# Altium PCB Copy of MB1363.PcbDoc (part 6 of 6)
Units mm, origin at the board's own origin, x right, y up, seen from the top; angles counter-clockwise.
Board outline 60.78 x 109.88 mm, 4 copper layers (Top Layer, Signal Layer 1, Signal Layer 2, Bottom Layer), stack 0.453 mm thick; 231 components, 215 nets, 716 pads, 2915 vias.
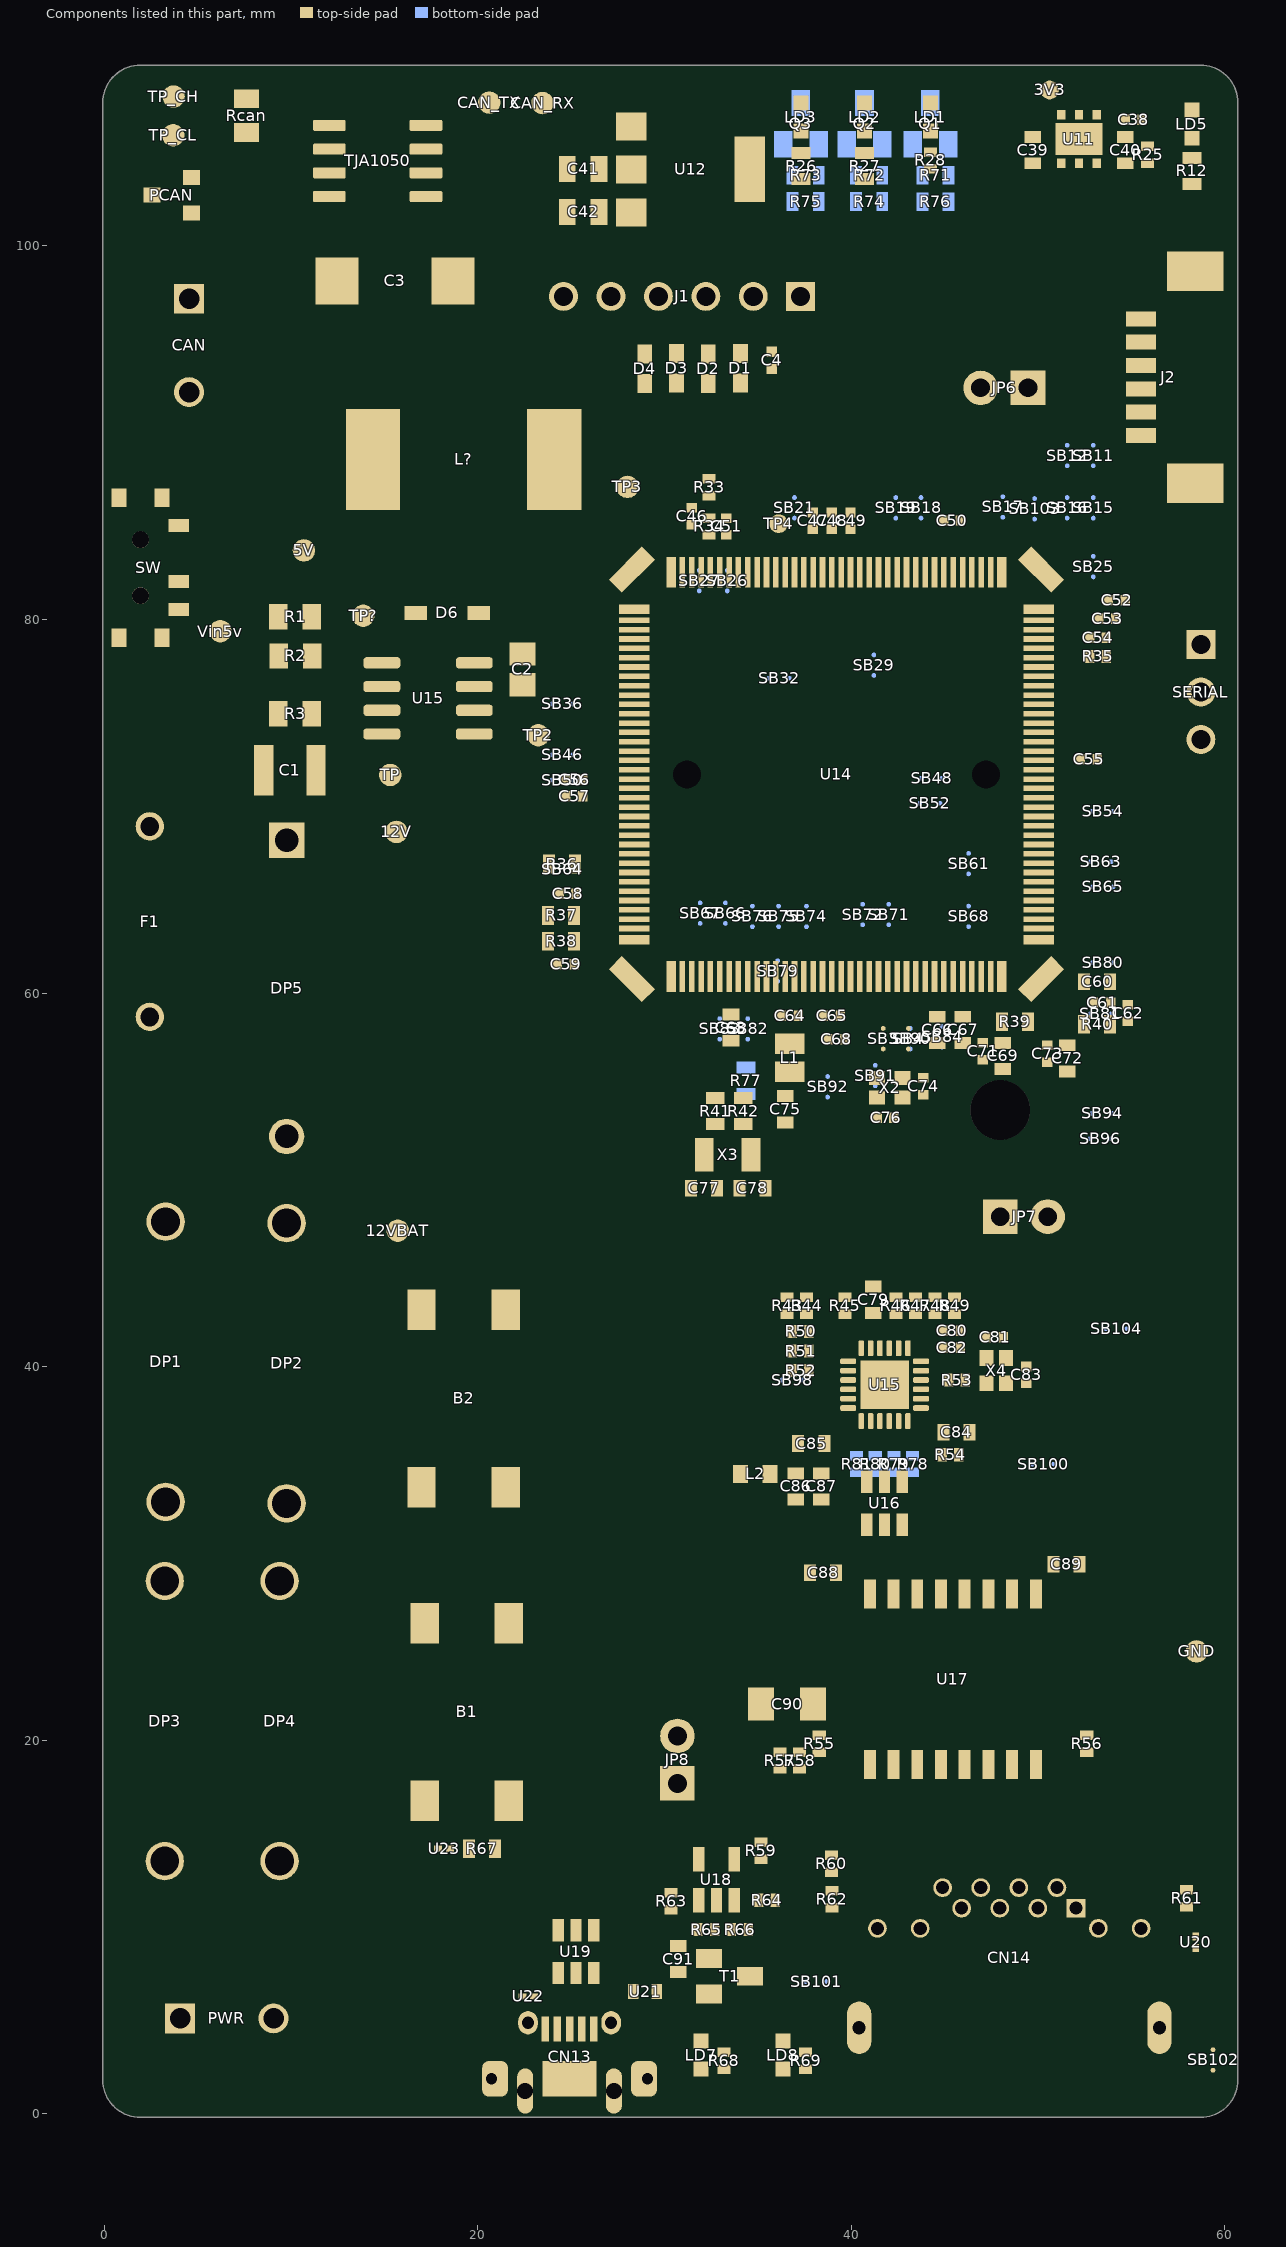
[diagram p7: the components of this part, seen from the top]

## Silkscreen, mask and mechanical layers (free items; w line width, h text height) (continued)
Drill Drawing:
  drawing of 490 lines, arcs and shapes, not listed
  text "PCB SPECIFICATIONS :" at 70.761,229.669 h3
  text "PCB : TYPE 3" at 219.173,229.437 h3
  text "A.   MATERIAL :" at 70.761,225.669 h3
  text "FR-4" at 109.261,225.669 h3
  text "TG-170" at 125.761,225.669 h3
  text "X  TG-150" at 144.011,225.669 h3
  text "TG-140" at 160.011,225.669 h3
  text "ASPECT-RATIO, AXE Z :" at 219.173,223.937 h3
  text "B.   MATERIAL FAMILY :" at 70.761,222.669 h3
  text "N/A" at 109.261,222.669 h3
  text "C.   SOLDERMASK COLOR :" at 70.761,219.669 h3
  text "GREEN" at 109.261,219.669 h3
  text "X  WHITE" at 125.761,219.669 h3
  text "RED" at 144.011,219.669 h3
  text "BLACK" at 160.011,219.669 h3
  text "6:1 to 8:1 / LEVEL \"B\"" at 219.191,217.189 h3
  text "D.   SILKSCREEN COLOR :" at 70.761,216.669 h3
  text "WHITE" at 109.261,216.669 h3
  text "YELLOW" at 125.761,216.669 h3
  text "BLACK" at 144.011,216.669 h3
  text "X  Blue ink PANTONE 2955" at 160.011,216.669 h3
  text "E.   SURFACE FINISH :" at 70.761,213.669 h3
  text "X  ENIG" at 109.261,213.669 h3
  text "IMMERSION SILVER" at 125.761,213.669 h3
  text "IMMERSION TIN" at 160.011,213.669 h3
  text "Symbol" at 352.253,213.235 h2.4
  text "Count" at 361.656,213.235 h2.4
  text "Hole Size" at 372.42,213.235 h2.4
  text "Plated" at 391.67,213.235 h2.4
  text "Hole Type" at 399.925,213.235 h2.4
  text "Drill Layer Pair" at 411.939,213.235 h2.4
  text "Hole Length" at 434.694,213.235 h2.4
  text "Routed Path Length" at 452.972,213.235 h2.4
  text "MINIMUM PARAMETERS" at 219.218,211.588 h3
  text "HASL" at 109.261,210.669 h3
  text "HASL (PB-FREE)" at 125.761,210.669 h3
  text "GOLDEN FINGER" at 160.011,210.669 h3
  text "2902" at 361.656,209.09 h2
  text "0.200mm (7.87mil)" at 372.42,209.09 h2
  text "PTH" at 391.67,209.09 h2
  text "Round" at 399.925,209.09 h2
  text "Top Layer - Bottom Layer" at 411.939,209.09 h2
  text "-" at 434.694,209.09 h2
  text "-" at 452.972,209.09 h2
  text "F.   IMPEDANCE CONTROL :" at 70.761,207.669 h3
  text "NO" at 109.261,207.669 h3
  text "X  YES  (SEE IMPEDANCE TABLE FOR DETAIL INFORMATION)" at 125.761,207.669 h3
  text "DEFAULT" at 219.218,206.088 h3
  text "13" at 361.656,204.944 h2
  text "0.300mm (11.81mil)" at 372.42,204.944 h2
  text "PTH" at 391.67,204.944 h2
  text "Round" at 399.925,204.944 h2
  text "Top Layer - Bottom Layer" at 411.939,204.944 h2
  text "-" at 434.694,204.944 h2
  text "-" at 452.972,204.944 h2
  text "G.   THROUGH VIA :" at 70.761,204.669 h3
  text "PLUG THE VIAS WHICH ARE COVERED WITH SOLDERMASK ONE OR TWO SIDE." at 109.261,204.669 h3
  text "PLUG MATERIAL :" at 109.261,201.669 h3
  text "X  SOLDERMASK" at 134.761,201.669 h3
  text "NON-CONDUCTIVE EPOXY." at 160.011,201.669 h3
  text "2" at 361.656,200.799 h2
  text "0.600mm (23.62mil)" at 372.42,200.799 h2
  text "PTH" at 391.67,200.799 h2
  text "Slot" at 399.925,200.799 h2
  text "Top Layer - Bottom Layer" at 411.939,200.799 h2
  text "1.300mm (51.18mil)" at 434.694,200.799 h2
  text "0.700mm (27.56mil)" at 452.972,200.799 h2
  text "TRACKS : 0.120mm           / GAPS : 0.120mm" at 219.218,200.338 h3
  text "H.   STACK-UP :" at 70.761,198.669 h3
  text "SEE LAYER STACK-UP SEQUENCE FOR OVERALL THICKNESS." at 109.261,198.669 h3
  text "2" at 361.656,196.654 h2
  text "0.650mm (25.59mil)" at 372.42,196.654 h2
  text "PTH" at 391.67,196.654 h2
  text "Slot" at 399.925,196.654 h2
  text "Top Layer - Bottom Layer" at 411.939,196.654 h2
  text "0.850mm (33.47mil)" at 434.694,196.654 h2
  text "0.200mm (7.88mil)" at 452.972,196.654 h2
  text "Layer" at 261.259,194.625 h2
  text "Name" at 269.629,194.625 h2
  text "Material" at 285.811,194.625 h2
  text "Thickness" at 300.355,194.625 h2
  text "Constant" at 312.3,194.625 h2
  text "Board Layer Stack" at 323.356,194.625 h2
  text "12" at 361.656,192.509 h2
  text "0.700mm (27.56mil)" at 372.42,192.509 h2
  text "PTH" at 391.67,192.509 h2
  text "Round" at 399.925,192.509 h2
  text "Top Layer - Bottom Layer" at 411.939,192.509 h2
  text "-" at 434.694,192.509 h2
  text "-" at 452.972,192.509 h2
  text "Top Overlay" at 269.629,190.625 h2
  text "2" at 361.656,188.363 h2
  text "0.700mm (27.56mil)" at 372.42,188.363 h2
  text "PTH" at 391.67,188.363 h2
  text "Slot" at 399.925,188.363 h2
  text "Top Layer - Bottom Layer" at 411.939,188.363 h2
  text "2.200mm (86.61mil)" at 434.694,188.363 h2
  text "1.500mm (59.06mil)" at 452.972,188.363 h2
  text "Top Solder" at 269.629,186.625 h2
  text "Solder Resist" at 285.811,186.625 h2
  text "0,015mm" at 300.355,186.625 h2
  text "3.5" at 312.3,186.625 h2
  text "2" at 361.656,184.218 h2
  text "0.850mm (33.47mil)" at 372.42,184.218 h2
  text "NPTH" at 391.67,184.218 h2
  text "Slot" at 399.925,184.218 h2
  text "Top Layer - Bottom Layer" at 411.939,184.218 h2
  text "2.425mm (95.47mil)" at 434.694,184.218 h2
  text "1.575mm (62.01mil)" at 452.972,184.218 h2
  text "1" at 261.259,182.625 h2
  text "Top Layer" at 269.629,182.625 h2
  text "0,042mm" at 300.355,182.625 h2
  text "2" at 361.656,180.073 h2
  text "0.900mm (35.43mil)" at 372.42,180.073 h2
  text "NPTH" at 391.67,180.073 h2
  text "Round" at 399.925,180.073 h2
  text "Top Layer - Bottom Layer" at 411.939,180.073 h2
  text "-" at 434.694,180.073 h2
  text "-" at 452.972,180.073 h2
  text "Dielectric 1" at 269.629,178.625 h2
  text "FR-4" at 285.811,178.625 h2
  text "0,099mm" at 300.355,178.625 h2
  text "4.2" at 312.3,178.625 h2
  text "6" at 361.656,175.927 h2
  text "1.000mm (39.37mil)" at 372.42,175.927 h2
  text "PTH" at 391.67,175.927 h2
  text "Round" at 399.925,175.927 h2
  text "Top Layer - Bottom Layer" at 411.939,175.927 h2
  text "-" at 434.694,175.927 h2
  text "-" at 452.972,175.927 h2
  text "2" at 261.257,174.625 h2
  text "Signal Layer 1" at 269.629,174.625 h2
  text "0,035mm" at 300.355,174.625 h2
  text "2" at 361.656,171.782 h2
  text "1.010mm (39.76mil)" at 372.42,171.782 h2
  text "PTH" at 391.67,171.782 h2
  text "Round" at 399.925,171.782 h2
  text "Top Layer - Bottom Layer" at 411.939,171.782 h2
  text "-" at 434.694,171.782 h2
  text "-" at 452.972,171.782 h2
  text "Dielectric 2" at 269.629,170.625 h2
  text "0,102mm" at 300.355,170.625 h2
  text "4.2" at 312.3,170.625 h2
  text "9" at 361.656,167.637 h2
  text "1.020mm (40.16mil)" at 372.42,167.637 h2
  text "PTH" at 391.67,167.637 h2
  text "Round" at 399.925,167.637 h2
  text "Top Layer - Bottom Layer" at 411.939,167.637 h2
  text "-" at 434.694,167.637 h2
  text "-" at 452.972,167.637 h2
  text "3" at 261.259,166.625 h2
  text "Signal Layer 2" at 269.629,166.625 h2
  text "0,035mm" at 300.355,166.625 h2
  text "4" at 361.656,163.492 h2
  text "1.100mm (43.31mil)" at 372.42,163.492 h2
  text "PTH" at 391.67,163.492 h2
  text "Round" at 399.925,163.492 h2
  text "Top Layer - Bottom Layer" at 411.939,163.492 h2
  text "-" at 434.694,163.492 h2
  text "-" at 452.972,163.492 h2
  text "A" at 351.465,163.238 h1.84
  text "Dielectric 3" at 269.629,162.625 h2
  text "0,099mm" at 300.355,162.625 h2
  text "4.2" at 312.3,162.625 h2
  text "2" at 361.656,159.346 h2
  text "1.260mm (49.61mil)" at 372.42,159.346 h2
  text "PTH" at 391.67,159.346 h2
  text "Round" at 399.925,159.346 h2
  text "Top Layer - Bottom Layer" at 411.939,159.346 h2
  text "-" at 434.694,159.346 h2
  text "-" at 452.972,159.346 h2
  text "4" at 261.259,158.625 h2
  text "Bottom Layer" at 269.629,158.625 h2
  text "0,042mm" at 300.355,158.625 h2
  text "2" at 361.656,155.201 h2
  text "1.500mm (59.06mil)" at 372.42,155.201 h2
  text "NPTH" at 391.67,155.201 h2
  text "Round" at 399.925,155.201 h2
  text "Top Layer - Bottom Layer" at 411.939,155.201 h2
  text "-" at 434.694,155.201 h2
  text "-" at 452.972,155.201 h2
  text "Bottom Solder" at 269.629,154.625 h2
  text "Solder Resist" at 285.811,154.625 h2
  text "0,015mm" at 300.355,154.625 h2
  text "3.5" at 312.3,154.625 h2
  text "8" at 361.656,151.056 h2
  text "1.550mm (61.02mil)" at 372.42,151.056 h2
  text "PTH" at 391.67,151.056 h2
  text "Round" at 399.925,151.056 h2
  text "Top Layer - Bottom Layer" at 411.939,151.056 h2
  text "-" at 434.694,151.056 h2
  text "-" at 452.972,151.056 h2
  text "Bottom Overlay" at 269.629,150.625 h2
  text "1" at 361.656,146.91 h2
  text "3.200mm (125.98mil)" at 372.42,146.91 h2
  text "NPTH" at 391.67,146.91 h2
  text "Round" at 399.925,146.91 h2
  text "Top Layer - Bottom Layer" at 411.939,146.91 h2
  text "-" at 434.694,146.91 h2
  text "-" at 452.972,146.91 h2
  text "2971 Total" at 361.656,142.765 h2
  text "Slot definitions :" at 352.253,139.863 h2
  text "Routed Path Length" at 365.894,139.863 h2
  text "= Calculated from tool start centre position to tool end centre position." at 382.79,139.863 h2
  text "Hole Length" at 365.894,138.205 h2
  text "= Routed Path Length + Tool Size = Slot length as defined in the PCB layout" at 376.518,138.205 h2

## Dimensions
14.966,105.8 to 63.226,104.53 on M4-Bottom Dimensions
47.986,53.73 to 63.226,104.53 on M4-Bottom Dimensions
7.346,127.39 to 7.346,13.09 on M4-Bottom Dimensions
14.966,33.41 to 7.346,13.09 on M4-Bottom Dimensions
7.346,13.09 to 6.1,0.391 on M4-Bottom Dimensions
16.236,29.6 to 7.346,13.09 on M4-Bottom Dimensions
16.236,29.6 to 61.956,29.6 on M4-Bottom Dimensions
14.966,33.41 to 63.226,33.41 on M4-Bottom Dimensions
7.346,13.09 to 70.846,13.065 on M4-Bottom Dimensions
4.1,2.391 to 74.1,2.391 on M4-Bottom Dimensions
47.986,53.73 to 63.226,104.53 on M4-Bottom Dimensions
63.226,104.53 to 70.846,101.965 on M4-Bottom Dimensions
7.346,127.39 to 7.346,101.99 on M4-Bottom Dimensions
7.346,129.93 to 6.1,133.731 on M4-Bottom Dimensions
63.226,104.53 to 70.846,127.39 on M4-Bottom Dimensions
72.1,133.731 to 72.1,0.391 on M4-Bottom Dimensions
14.966,105.8 to 7.346,101.99 on M4-Bottom Dimensions
-0.064,1.8 to -0.064,1.8 on M3-Top Dimensions
-0.064,107.675 to -0.064,1.8 on M3-Top Dimensions

## Text inside footprints (layer, text, board x,y; h text height)
C3: Top Overlay "+" at 14.051,97.363 h1.52
CN13: Top Overlay "1" at 28.825,3.625 h1.5; M14-Top Assembly "1" at 26.098,4.039 h1; M14-Top Assembly "5" at 23.398,4.039 h1; M7-Top Info "EDGE" at 29.348,-0.136 h0.75; M7-Top Info "PCB" at 18.698,-0.136 h0.75
CN14: Top Overlay "1" at 51.814,11.975 h1.5; Top Overlay "G" at 42.139,10.65 h1.5; Top Overlay "Y" at 53.939,10.675 h1.5; M14-Top Assembly "YELLOW" at 52.869,8.75 h0.8; M14-Top Assembly "GREEN" at 41.269,8.75 h0.8; M14-Top Assembly "1" at 51.869,10.55 h1.5; M14-Top Assembly "2" at 50.694,11.4 h1.5; M14-Top Assembly "8" at 44.569,11.4 h1.5; M14-Top Assembly "7" at 45.619,10.525 h1.5; M7-Top Info "BOARD OUTLINE /  / CUT OUT" at 42.969,2.5 h1.52; M7-Top Info "PCB" at 38.869,-0.8 h1.5; M7-Top Info "EDGE" at 55.469,-0.8 h1.5; Keep-Out Layer "BOARD OUTLINE /  / CUT OUT" at 42.969,2.5 h1.52
JP6: Top Overlay "1" at 50.944,91.876 h1.5; M14-Top Assembly "1" at 49.725,92.925 h1.5 r180
JP7: Top Overlay "1" at 46.181,47.574 h1.5; M14-Top Assembly "1" at 47.731,47.499 h1.5
JP8: Top Overlay "1" at 31.15,15.875 h1.5 r90; M14-Top Assembly "1" at 31.225,17.425 h1.5 r90
LD1: M14-Top Assembly "K" at 44.491,107.797 h0.75 r90
LD2: M14-Top Assembly "K" at 40.966,107.797 h0.75 r90
LD3: M14-Top Assembly "K" at 37.558,107.797 h0.75 r90
LD5: M14-Top Assembly "K" at 58.498,107.418 h0.75 r90
LD7: M14-Top Assembly "K" at 32.216,4.029 h0.75 r90
LD8: M14-Top Assembly "K" at 36.591,4.029 h0.75 r90
U11: Top Overlay "1" at 53.852,106.424 h1.5
U12: Top Overlay "1" at 28.1,107.625 h1.5 r270; M14-Top Assembly "4" at 33.775,104.425 h1.5 r270; M14-Top Assembly "1" at 28.05,106.6 h1.5 r270; M14-Top Assembly "2" at 28.025,104.45 h1.5 r270; M14-Top Assembly "3" at 28,102.15 h1.5 r270
U14: Top Overlay "1" at 30.991,59.479 h1.5 r90; M14-Top Assembly "72" at 49.241,79.554 h1 r90; M14-Top Assembly "37" at 49.216,61.979 h1 r90; M14-Top Assembly "108" at 30.966,79.679 h1 r90; M14-Top Assembly "144" at 30.166,62.229 h1 r90; M14-Top Assembly "36" at 48.466,61.704 h1 r90; M14-Top Assembly "109" at 30.166,79.129 h1 r90; M14-Top Assembly "73" at 48.466,79.754 h1 r90; M14-Top Assembly "1" at 30.791,61.854 h1 r90
U15: Top Overlay "1" at 43.925,36.55 h1.5; M14-Top Assembly "6" at 44.241,40.154 h0.65 r90; M14-Top Assembly "7" at 43.191,41.479 h0.65 r180; M14-Top Assembly "25" at 42.091,39.254 h0.65 r180; M14-Top Assembly "1" at 44.266,37.704 h0.65 r90; M14-Top Assembly "24" at 43.366,36.979 h0.65 r180; M14-Top Assembly "12" at 40.816,41.479 h0.65 r180; M14-Top Assembly "13" at 39.341,40.554 h0.65 r270; M14-Top Assembly "19" at 40.816,36.979 h0.65 r180; M14-Top Assembly "18" at 39.341,38.054 h0.65 r270
U16: Top Overlay "1" at 43.25,33.8 h1.5; M14-Top Assembly "2" at 41.941,34.104 h0.75 r180; M14-Top Assembly "1" at 42.841,34.104 h0.75 r180; M14-Top Assembly "6" at 42.891,31.754 h0.75 r180; M14-Top Assembly "5" at 41.941,31.754 h0.75 r180; M14-Top Assembly "3" at 41.011,34.109 h0.75 r180; M14-Top Assembly "4" at 41.011,31.769 h0.75 r180
U17: Top Overlay "1" at 50.325,27.025 h1.5; Top Overlay "16" at 50.35,18.525 h1.5; Top Overlay "8" at 39.875,27.125 h1.5; Top Overlay "9" at 39.9,18.525 h1.5; M14-Top Assembly "1" at 50.082,26.609 h1.5 r180; M14-Top Assembly "16" at 50.526,20.859 h1.5 r180; M14-Top Assembly "9" at 41.319,20.859 h1.5 r180; M14-Top Assembly "8" at 41.319,26.609 h1.5 r180
U18: Top Overlay "1" at 31.066,10.499 h1.5
U19: Top Overlay "1" at 26.675,9.725 h1.5; M14-Top Assembly "2" at 25.416,10.104 h0.75 r180; M14-Top Assembly "1" at 26.316,10.104 h0.75 r180; M14-Top Assembly "6" at 26.366,7.754 h0.75 r180; M14-Top Assembly "5" at 25.416,7.754 h0.75 r180; M14-Top Assembly "3" at 24.486,10.109 h0.75 r180; M14-Top Assembly "4" at 24.486,7.769 h0.75 r180
U20: M14-Top Assembly "K" at 58.3,9.75 h0.45 r270
U21: M14-Top Assembly "2" at 29.291,6.029 h0.75; M14-Top Assembly "1" at 28.141,6.054 h0.75
U22: M14-Top Assembly "K" at 23.291,6.429 h0.45 r180
U23: M14-Top Assembly "K" at 18.779,14.334 h0.45 r180
X2: M14-Top Assembly "1" at 41.341,54.279 h0.5; M14-Top Assembly "2" at 42.591,54.279 h0.5; M14-Top Assembly "3" at 42.591,55.254 h0.5; M14-Top Assembly "4" at 41.316,55.254 h0.5
X4: M14-Top Assembly "1" at 48.416,39.054 h0.5 r90; M14-Top Assembly "2" at 48.416,40.304 h0.5 r90; M14-Top Assembly "3" at 47.441,40.304 h0.5 r90; M14-Top Assembly "4" at 47.441,39.029 h0.5 r90